# EAGLE board plugV5 (EAGLE 7.5.0)

Size 100 x 80 mm. Coordinates in mm from the lower left corner, seen from the top.
Outline: 0,0 100,0 100,80 0,80 0,0
Copper layers (1*16): Top 0.035mm / dielectric 1.5mm / Bottom 0.035mm
Design rules "default": minimum track width 10mil, minimum drill 24mil, track to track 8mil, track to pad 8mil, pad to pad 8mil, via to via 8mil, smd to smd 8mil, copper to edge 40mil, drill to drill 8mil, minimum pad ring 10mil, minimum via ring 8mil, stop-mask expansion 4mil, vias tented up to drill 0mil, thermal gap 10mil

## Footprints (pad centres in the part's own frame; a part is rotated, then mirrored left to right if it is on the bottom)
78XXS = drill 1.016 long: GND 0,-2.54; IN -2.54,-2.54; OUT 2.54,-2.54
C025-025X050 = drill 0.813 octagon: 1 -1.27,0; 2 1.27,0
DO41-10 = drill 1.118: A 5.08,0; C -5.08,0
SH22,5A = drill 1.321 pad 2.54 long: 1 -11.252,0; 2 11.252,0
LED3MM = drill 0.813 octagon: A -1.27,0; K 1.27,0
1X03 = drill 1.016 long: 1 -2.54,0; 2 0,0; 3 2.54,0
DIL04 = drill 0.813 offset: 1 -1.27,-3.81; 2 1.27,-3.81; 3 1.27,3.81; 4 -1.27,3.81
0204/5 = drill 0.813 octagon: 1 -2.54,0; 2 2.54,0
2X11 = drill 1.016 octagon: 1 -12.7,-1.27; 2 -12.7,1.27; 3 -10.16,-1.27; 4 -10.16,1.27; 5 -7.62,-1.27; 6 -7.62,1.27; 7 -5.08,-1.27; 8 -5.08,1.27; 9 -2.54,-1.27; 10 -2.54,1.27; 11 0,-1.27; 12 0,1.27; 13 2.54,-1.27; 14 2.54,1.27; 15 5.08,-1.27; 16 5.08,1.27; 17 7.62,-1.27; 18 7.62,1.27; 19 10.16,-1.27; 20 10.16,1.27; 21 12.7,-1.27; 22 12.7,1.27
SW2-5.0-6.0X3.0X4.3MM = drill 0.8 pad 1.27: 1 -2.5,0; 2 2.5,0
TO92-ECB = drill 0.813 long: B 2.54,0; C 0,0; E -2.54,0
HLK-PM01 = drill 0.8 square: +5V 15.19,-7.76; AC1 -14.21,2.44; AC2 -14.21,-2.56; GND 15.19,7.64
RELAY-SONGLE = drill 1.3 pad 2.1: COM -8.1,0; NC 6.1,6; NO 6.1,-6; V+ -6.1,6; V- -6.1,-6
AK300/2 = drill 1.321 long: 1 -2.515,0; 2 2.489,0

## Placement (x,y rotation side)
7803  5to3.3V  [78XXS]  20,36 0 top
C1  0.33uF  [C025-025X050]  18,26 0 top
C2  0.1uF  [C025-025X050]  24,26 180 top
D1  1N4004  [DO41-10]  56.39,26.04 180 top
F1  5A  [SH22,5A]  7,29 90 top
LED1  RED  [LED3MM]  6.12,52.65 0 top
LED2  [LED3MM]  70.96,19.39 0 top
NEO  [1X03]  16.39,74.6 0 top
OK1  PC817  [DIL04]  34.37,26.23 90 top
PIR  [1X03]  6.39,74.3 0 top
R1  230  [0204/5]  5.39,63.46 0 top
R2  470  [0204/5]  46.17,33.61 270 top
R3  1k  [0204/5]  42.47,33.77 270 top
R4  510  [0204/5]  38.69,34.23 90 top
SOCKET  esp8266  [2X11]  39.09,58.9 270 bottom
SW1  [SW2-5.0-6.0X3.0X4.3MM]  51.28,33.61 270 top
T1  2SC458  [TO92-ECB]  31.07,34.58 0 top
U$1  HLK-PM01  [HLK-PM01]  31,12 0 top
U$2  RELAY-SONGLE  [RELAY-SONGLE]  58.99,11.58 270 top
X1  220V  [AK300/2]  7,8 0 top
X2  Plug  [AK300/2]  73.44,8.12 0 top

## Library data of the parts
7803 = v-reg
C1 C2 R1-R4 = rcl
D1 = diode
F1 = fuse; MPN: 0031.7701.11; OC_FARNELL: unknown; OC_NEWARK: 04F1224
LED1 LED2 = led
NEO PIR SOCKET = pinhead
OK1 = optocoupler; MPN: PC817X4J000F; OC_FARNELL: 9707727; OC_NEWARK: 97K7059
SW1 = Seeed-OPL-Switch
T1 = transistor
U$1 = HLK-PM01
U$2 = Seeed-OPL-Relay
X1 X2 = con-ptr500; OC_FARNELL: unknown; OC_NEWARK: unknown

## Nets
+3V3: 7803.OUT C2.1 SOCKET.8
+5V: 7803.IN C1.1 D1.C NEO.1 OK1.4 PIR.1 R3.1 U$1.+5V U$2.V+
GND: 7803.GND C1.2 C2.2 LED1.K NEO.3 PIR.3 SOCKET.15 SW1.2 T1.E U$1.GND
N$1: F1.1 U$2.NO X1.1
N$2: F1.2 U$1.AC1
N$3: U$1.AC2 X1.2 X2.2
N$4: U$2.COM X2.1
N$7: LED1.A R1.2
N$8: R1.1 SOCKET.4
N$9: PIR.2 SOCKET.16
N$10: NEO.2 SOCKET.5
N$11: R2.2 SW1.1
N$12: R2.1 SOCKET.17
N$13: OK1.1 R3.2
N$14: LED2.A SOCKET.6
N$15: LED2.K OK1.2
N$16: OK1.3 R4.1
N$17: R4.2 T1.B
N$18: D1.A T1.C U$2.V-

## Tracks (layer width: path | path; a pad name or v marks a point on that pad's centre or on a via)
+3V3  (2 unrouted)
+5V  (8 unrouted)
GND  (9 unrouted)
N$1  (2 unrouted)
N$2  (1 unrouted)
N$3  (2 unrouted)
N$4  (1 unrouted)
N$7  (1 unrouted)
N$8  (1 unrouted)
N$9  (1 unrouted)
N$10  (1 unrouted)
N$11  (1 unrouted)
N$12  (1 unrouted)
N$13  (1 unrouted)
N$14  (1 unrouted)
N$15  (1 unrouted)
N$16  (1 unrouted)
N$17  (1 unrouted)
N$18  (2 unrouted)